# Altium PCB PCB-NW0101 Rev.A.1.PcbDoc (part 2 of 3)
Units mil, origin at the board's own origin, x right, y up, seen from the top; angles counter-clockwise.
Board outline 787.4 x 1377.95 mil, 6 copper layers (Top, GND, Inner3, Inner4, PWR, Bottom), stack 29.136 mil thick; 118 components, 126 nets, 559 pads, 476 vias.
Unrouted connection lines stored in the file: 214.
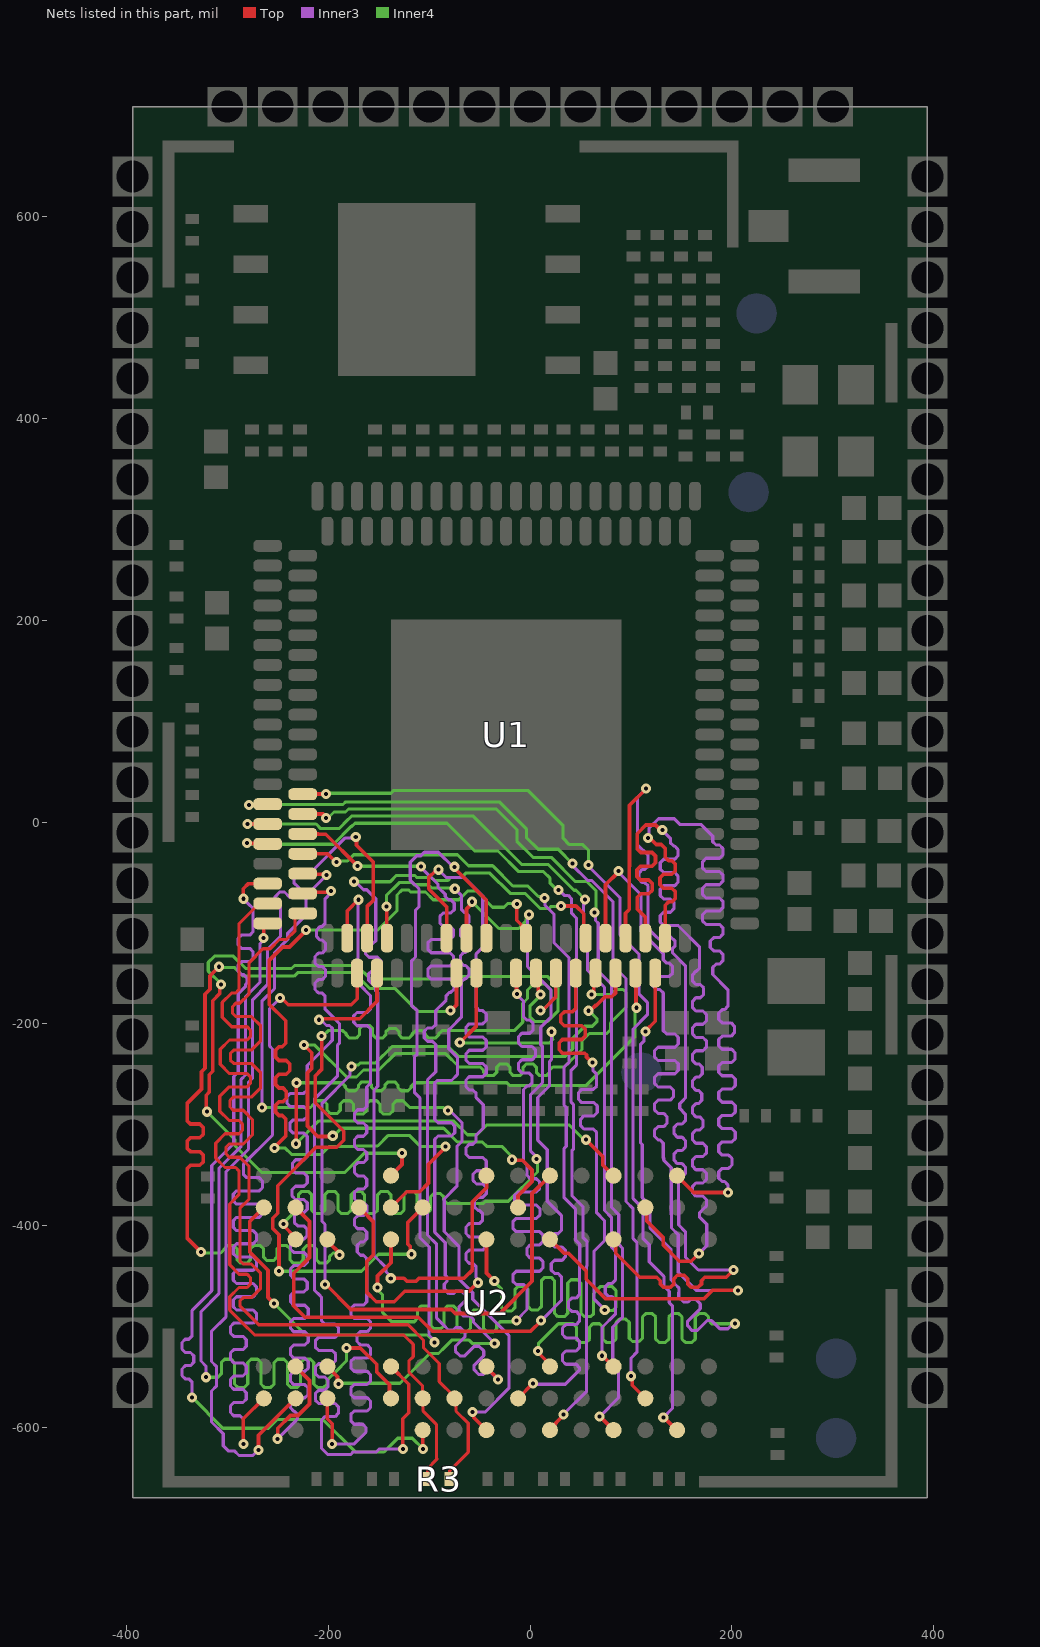
[diagram p6: the nets of this part, all layers, seen from the top]

## Via types
v1: diameter 10, hole 4, Top to Bottom, tented both sides, 476 vias

## Nets (pads, with @x,y where several pads share a name; then routed paths per layer and width w, separated by ;. In a path a pad name is that pad's centre, name@x,y a point inside that pad or via, vN(x,y) a via of type N, cw(c..) or ccw(c..) an arc to the next point about the centre after c; other vN are vias at no path point) (continued)
DDR_A4: U1.82 U2.N8 | length 917
  Top w3.63: U2.N8@-201,-572 -200.79,-572.21 -200.79,-591.24 -196,-596.03 v1(-196,-616) ; U1.82@-181.1,-114.96 -181.1,-88.11 v1@-170.08,-77.09
  Inner3 w3.1: v1(-196,-616) -174,-616 -164,-606 -162.45,-604.45 -162.45,-599.82 -165.72,-596.54 -174.24,-596.54 -177.51,-593.27 -177.51,-586.72 -174.24,-583.44 -161.37,-583.44 -158.1,-580.16 -158.1,-573.61 -161.37,-570.34 -174.24,-570.34 -177.51,-567.06 -177.51,-560.51 -174.24,-557.24 -161.37,-557.24 -158.1,-553.96 -158.1,-547.41 -161.37,-544.14 -174.24,-544.14 -177.51,-540.86 -177.51,-534.31 -174.24,-531.03 -161.37,-531.03 -158.1,-527.76 -158.1,-521.21 -161.37,-517.93 -168.17,-517.93 -171.45,-514.66 -171.45,-508.11 -168.17,-504.83 -161.37,-504.83 -158.1,-501.56 -158.1,-495 -161.37,-491.73 -174.24,-491.73 -177.51,-488.45 -177.51,-481.9 -174.24,-478.63 -165.01,-478.63 -161.73,-475.35 -161.73,-471 -161.73,-434 -161.73,-432.45 -165.01,-429.17 -167.89,-429.17 -171.17,-425.9 -171.17,-419.35 -167.89,-416.07 -165.01,-416.07 -161.73,-412.8 -161.73,-406.25 -165.01,-402.97 -170.62,-402.97 -173.9,-399.7 -173.9,-393.14 -170.62,-389.87 -165.01,-389.87 -161.73,-386.59 -161.73,-380.04 -165.01,-376.77 -170.62,-376.77 -173.9,-373.49 -173.9,-366.94 -170.62,-363.67 -165.01,-363.67 -161.73,-360.39 -161.73,-353.84 -165.01,-350.56 -170.62,-350.56 -173.9,-347.29 -173.9,-340.74 -170.62,-337.46 -165.01,-337.46 -161.73,-334.19 -161.73,-327.64 -165.01,-324.36 -170.62,-324.36 -173.9,-321.09 -173.9,-314.54 -170.62,-311.26 -165.01,-311.26 -161.73,-307.98 -161.73,-301.43 -165.01,-298.16 -170.62,-298.16 -173.9,-294.88 -173.9,-288.33 -170.62,-285.06 -165.01,-285.06 -161.73,-281.78 -161.73,-262.52 -158,-258.78 -158,-254.42 -158,-232.84 -158,-205.08 -161.27,-201.81 -171.37,-201.81 -174.64,-198.53 -174.64,-191.98 -171.37,-188.71 -161.27,-188.71 -158,-185.43 -158,-172.05 -168.85,-161.19 -169.04,-161 -170.51,-159.54 -170.51,-85 -170.51,-77.52 v1(-169.99,-77)
DDR_A5: U1.93 U2.N3 | length 897.3
  Top w3.63: v1(-325.86,-426) -339.72,-412.14 -339.72,-359 -339.72,-343.55 -336.31,-340.14 -327.25,-340.14 -323.84,-336.73 -323.84,-329.91 -327.25,-326.5 -336.31,-326.5 -339.72,-323.1 -339.72,-316.28 -336.31,-312.87 -327.25,-312.87 -323.84,-309.46 -323.84,-302.64 -327.25,-299.24 -336.31,-299.24 -339.72,-295.83 -339.72,-289 -339.72,-278.8 -325.45,-264.54 -325.45,-247.36 -321.94,-243.84 -321.94,-170.72 -317.02,-165.8 -317.02,-152.2 v1(-308.18,-143.37) ; U2.N3@-200.09,-413 -200.09,-415.76 -188.82,-427.03 v1(-188.82,-428.7) ; v1(-78.64,-186.91) -78.46,-186.91 -72.83,-181.28 U1.93@-72.83,-149.6
  Inner4 w3.09: v1(-325.86,-426) -324.86,-427 -308,-427 -306.46,-427 -303.18,-423.73 -303.18,-422.94 -299.91,-419.67 -293.37,-419.67 -290.1,-422.94 -290.1,-433.73 -286.83,-437 -280.28,-437 -277.01,-433.73 -277.01,-422.94 -273.74,-419.67 -267.2,-419.67 -263.93,-422.94 -263.93,-431.19 -260.65,-434.46 -254.11,-434.46 -250.84,-431.19 -250.84,-422.94 -247.57,-419.67 -241.02,-419.67 -237.75,-422.94 -237.75,-433.73 -234.48,-437 -227.94,-437 -224.67,-433.73 -224.67,-422.94 -221.39,-419.67 -214.85,-419.67 -211.58,-422.94 -211.58,-433.73 -208.31,-437 -201.77,-437 -198.49,-433.73 -198.49,-430.27 -195.22,-427 -191,-427 -190.52,-427 v1(-188.82,-428.7) ; v1(-308.18,-143.37) -307.56,-144 -292.88,-144 -284.25,-152.63 -233.72,-152.63 -230.27,-149.17 -174.64,-149.17 -159,-164.81 -134.1,-164.81 -111.37,-187.54 -79.27,-187.54 v1(-78.64,-186.91)
DDR_A6: U1.86 U2.N7 | length 897.3
  Top w3.63: U2.N7@-200.6,-539.62 -190.81,-549.41 -190.81,-555.28 v1(-189.59,-556.5) ; v1(-142.32,-83.68) -142.03,-83.97 -142.03,-114.67 U1.86@-141.73,-114.96
  Inner3 w3.1: v1@-74.53,-66.1 -68,-72.64 -68,-77 -68,-86.45 -64.72,-89.73 -63.83,-89.73 -60.55,-93 -60.55,-99.56 -63.83,-102.83 -65.62,-102.83 -68.9,-106.11 -68.9,-112.66 -65.62,-115.93 -63.83,-115.93 -60.55,-119.21 -60.55,-125.76 -63.83,-129.03 -65.62,-129.03 -68.9,-132.31 -68.9,-138.86 -65.62,-142.14 -63.83,-142.14 -60.55,-145.41 -60.55,-151.96 -63.83,-155.24 -64.72,-155.24 -68,-158.51 -68,-193.37 -78.63,-204 -80.55,-205.92 -80.55,-224.59 -72.03,-233.12 -72.03,-250.24 -77.79,-256 -92.04,-256 -94.45,-258.41 -94.45,-274 -94.45,-294.7 -91.17,-297.97 -77.83,-297.97 -74.55,-301.25 -74.55,-307.8 -77.83,-311.07 -91.17,-311.07 -94.45,-314.35 -94.45,-329 -94.45,-406.24 -83.96,-416.73 -83.96,-448.96 -82.86,-450.06 -82.35,-450.57 -82.35,-455.21 -85.03,-457.89 -85.03,-462.52 -80.4,-467.15 -75.77,-467.15 -73.08,-464.47 -68.45,-464.47 -63.82,-469.1 -63.82,-473.73 -70.28,-480.2 -70.28,-484.83 -65.65,-489.46 -59.28,-489.46 -56,-492.74 -56,-495.63 -54.91,-496.73 v1(-35,-516.63)
  Inner4 w3.09: v1(-189.59,-556.5) -189.09,-556 -128.82,-556 -99.37,-526.54 -90.63,-526.54 -84.4,-520.31 -84.4,-520.2 -77.2,-513 -60.82,-513 -57.37,-516.46 -35.18,-516.46 v1(-35,-516.63) ; v1(-142.32,-83.68) -142.32,-72.84 -129.57,-60.09 -116.85,-60.09 -114.75,-62.18 -100.65,-62.18 -97.29,-65.54 -75.12,-65.54 v1(-74.56,-66.1)
DDR_A7: U1.95 U2.P2 | length 889.9
  Top w3.63: -234.29,-479.29 -222.95,-490.62 -110.64,-490.62 -96.68,-504.57 0.43,-504.57 v1(11,-494) ; -234,-479 -234,-446.92 -218.47,-431.38 -218.47,-395.71 U2.P2@-232.28,-381.89 ; v1(-69.61,-218.57) -53.15,-202.15 U1.95@-53.15,-149.6
  Inner3 w3.1: v1(11,-494) 31,-474 31,-452 31,-450.45 27.72,-447.17 24.28,-447.17 21,-443.9 21,-437.35 24.28,-434.07 31.76,-434.07 35.03,-430.8 35.03,-424.25 31.76,-420.97 24.28,-420.97 21,-417.7 21,-411.14 24.28,-407.87 27.72,-407.87 31,-404.59 31,-396 31,-389.7 17.06,-375.77 17.06,-324.52 7.65,-315.11 7.65,-272.86 19.43,-261.07 19.43,-237.11 21.11,-235.44 v1(21.11,-207.77)
  Inner4 w3.09: v1(-69.61,-218.57) -69.19,-219 19,-219 22.67,-215.33 22.43,-215.08 22.43,-209.1 v1(21.11,-207.77)
DDR_A8: U1.84 U2.P8 | length 932.9
  Top w3.63: v1(-269,-622) -269,-607.58 -233,-571.58 U2.P8@-233,-570 ; v1(-172.67,-14.83) -171.91,-15.6 -171.91,-23.09 -155.35,-39.65 -155.35,-77.66 -161.42,-83.72 U1.84@-161.42,-114.96
  Inner3 w3.1: v1(-269,-622) -274.55,-627.55 -288.37,-627.55 -292.92,-623 -299,-623 -303.93,-618.07 -303.93,-605.99 -315.55,-594.37 -315.55,-563.63 -310.45,-558.53 -310.45,-539.47 -315.55,-534.37 -315.55,-504.4 -301.1,-489.95 -301.1,-346.19 -278.95,-324.03 -278.95,-257.71 -274.8,-253.56 -274.8,-175.93 -260.25,-161.38 -260.25,-126.3 -247.14,-113.2 -247.14,-90.86 -247.14,-84.03 -252.54,-78.64 -252.54,-74 -247.91,-69.37 -243.27,-69.37 -238.16,-74.49 -233.53,-74.49 -228.9,-69.85 -228.9,-65.22 -234.01,-60.11 -234.01,-55.48 -229.38,-50.84 -224.74,-50.84 -220.61,-54.98 -215.98,-54.98 -214,-53 -214,-46.79 -182.92,-15.71 -173.55,-15.71 v1(-172.67,-14.83)
DDR_A9: U1.94 U2.P3 | length 881.3
  Top w3.63: v1(-244.07,-398.26) -244.07,-399.93 -233,-411 U2.P3@-233,-413 ; U1.94@-62.99,-114.96 -62.99,-86.27 -57.45,-80.72 v1(-57.45,-79)
  Inner3 w3.1: v1(-1.16,-91.83) -2.45,-93.12 -2.45,-143.25 20.9,-166.61 20.9,-184.02 20.9,-193.05 10.55,-203.39 10.55,-220.81 12.42,-222.68 12.42,-234.08 12.33,-234.17 12.33,-258.13 0.55,-269.91 0.55,-326.05 6.51,-332.01 v1(6.51,-333.88)
  Inner4 w3.09: v1(-244.07,-398.26) -244.07,-397.07 -231.04,-384.04 -229.5,-382.5 -229.5,-369.11 -226.23,-365.83 -219.69,-365.83 -216.41,-369.11 -216.41,-384.47 -213.14,-387.74 -206.6,-387.74 -203.33,-384.47 -203.33,-369.11 -200.06,-365.83 -193.51,-365.83 -190.24,-369.11 -190.24,-384.47 -186.97,-387.74 -180.43,-387.74 -177.16,-384.47 -177.16,-369.11 -173.88,-365.83 -167.34,-365.83 -164.07,-369.11 -164.07,-384.47 -160.8,-387.74 -154.25,-387.74 -150.98,-384.47 -150.98,-369.11 -147.71,-365.83 -141.17,-365.83 -137.9,-369.11 -137.9,-384.47 -134.62,-387.74 -128.08,-387.74 -124.81,-384.47 -124.81,-369.11 -121.54,-365.83 -115,-365.83 -111.72,-369.11 -111.72,-384.47 -108.45,-387.74 -101.91,-387.74 -98.64,-384.47 -98.64,-371.3 -95.37,-368.03 -88.82,-368.03 -85.55,-371.3 -85.55,-374.47 -82.28,-377.74 -68.57,-377.74 -46.1,-377.74 -44.02,-375.66 -21.55,-375.66 7.42,-346.69 7.42,-334.79 v1(6.51,-333.88) ; v1(-57.45,-79) -30.91,-105.54 -11.34,-105.54 -3.74,-97.95 -3.74,-96.27 -1.16,-93.7 v1(-1.16,-91.83)
DDR_A10: U1.92 U2.M2 | length 935.6
  Top w3.63: U2.M2@-166,-383 -166,-385.18 -155.47,-395.71 -155.47,-429.16 -161.9,-435.59 -161.9,-465.7 -152.24,-475.35 -134.54,-475.35 -125.06,-465.88 -124,-464.82 -71.06,-464.82 -60.49,-464.82 -52.05,-456.37 v1(-51.59,-456.37) ; v1(-90.65,-47.24) -92.27,-47.24 -97.27,-52.24 -97.76,-52.24 -100.33,-54.81 -100.33,-66.26 -82.68,-83.91 U1.92@-82.68,-114.96
  Inner3 w3.1: v1(-90.65,-47.24) -82.98,-54.91 -65.35,-54.91 -46.9,-73.36 -46.9,-124.04 -53.45,-130.59 -53.45,-182 -53.45,-183.55 -50.17,-186.83 -46.72,-186.83 -43.45,-190.1 -43.45,-196.65 -46.72,-199.93 -60.17,-199.93 -63.45,-203.2 -63.45,-209.75 -60.17,-213.03 -46.72,-213.03 -43.45,-216.3 -43.45,-222.86 -46.72,-226.13 -60.17,-226.13 -63.45,-229.41 -63.45,-235.96 -60.17,-239.23 -46.72,-239.23 -43.45,-242.51 -43.45,-249.06 -46.72,-252.33 -60.17,-252.33 -63.45,-255.61 -63.45,-262.16 -60.17,-265.44 -56.72,-265.44 -53.45,-268.71 -53.45,-273 -46.35,-280.1 -46.35,-303.08 -52.53,-309.26 -52.71,-309.26 -53.45,-310 -53.45,-315.98 -56.72,-319.26 -60.17,-319.26 -63.45,-322.54 -63.45,-329.09 -60.17,-332.36 -46.72,-332.36 -43.45,-335.64 -43.45,-342.19 -46.72,-345.46 -53.11,-345.46 -56.39,-348.74 -56.39,-355.29 -53.11,-358.56 -46.72,-358.56 -43.45,-361.84 -43.45,-368.39 -46.72,-371.67 -51.6,-371.67 -54.87,-374.94 -54.87,-381.49 -51.6,-384.77 -50.28,-384.77 -47,-388.04 -47,-394.59 -50.28,-397.87 -60.17,-397.87 -63.45,-401.14 -63.45,-407.7 -60.17,-410.97 -46.72,-410.97 -43.45,-414.25 -43.45,-420.8 -46.72,-424.07 -60.17,-424.07 -63.45,-427.35 -63.45,-433.9 -60.17,-437.17 -56.72,-437.17 -53.45,-440.45 -53.45,-442 -53.45,-451.11 -52.91,-451.65 -52.91,-455.05 v1(-51.59,-456.37)
DDR_A11: U1.85 U2.P7 | length 929.2
  Top w3.63: v1(-250,-611) -250,-600.54 -237.42,-587.95 -229.83,-587.95 -218.47,-576.59 -218.47,-553.19 -233,-538.65 U2.P7@-233,-538 ; v1(-209.24,-195.88) -208.18,-194.82 -168.82,-194.82 -151.58,-177.58 U1.85@-151.58,-149.6
  Inner3 w3.1: v1(-250,-611) -232,-593 -230.45,-591.45 -230.45,-586.82 -233.72,-583.54 -234.05,-583.54 -237.32,-580.27 -237.32,-573.72 -234.05,-570.44 -223.01,-570.44 -219.73,-567.16 -219.73,-560.61 -223.01,-557.34 -234.05,-557.34 -237.32,-554.06 -237.32,-547.51 -234.05,-544.24 -223.01,-544.24 -219.73,-540.96 -219.73,-534.41 -223.01,-531.14 -234.05,-531.14 -237.32,-527.86 -237.32,-521.31 -234.05,-518.03 -223.01,-518.03 -219.73,-514.76 -219.73,-508.21 -223.01,-504.93 -234.05,-504.93 -237.32,-501.66 -237.32,-495.11 -234.05,-491.83 -223.01,-491.83 -219.73,-488.56 -219.73,-482 -223.01,-478.73 -234.05,-478.73 -237.32,-475.45 -237.32,-468.9 -234.05,-465.63 -224.01,-465.63 -220.73,-462.35 -220.73,-455.8 -224.01,-452.53 -234.05,-452.53 -237.32,-449.25 -237.32,-442.7 -234.05,-439.42 -224.01,-439.42 -220.73,-436.15 -220.73,-429.6 -224.01,-426.32 -234.05,-426.32 -237.32,-423.05 -237.32,-416.5 -234.05,-413.22 -224.01,-413.22 -220.73,-409.95 -220.73,-403.4 -224.01,-400.12 -230.24,-400.12 -233.52,-396.85 -233.52,-390.29 -230.24,-387.02 -224.01,-387.02 -220.73,-383.74 -220.73,-377.19 -224.01,-373.92 -232.39,-373.92 -235.66,-370.64 -235.66,-364.09 -232.39,-360.82 -224.01,-360.82 -220.73,-357.54 -220.73,-350.99 -224.01,-347.71 -232.09,-347.71 -235.37,-344.44 -235.37,-337.89 -232.09,-334.61 -224.01,-334.61 -220.73,-331.34 -220.73,-323.1 -220.73,-313 -220.73,-311.45 -224.01,-308.17 -234.7,-308.17 -237.98,-304.9 -237.98,-298.35 -234.7,-295.07 -224.01,-295.07 -220.73,-291.8 -220.73,-285.25 -224.01,-281.97 -237.43,-281.97 -240.7,-278.7 -240.7,-272.14 -237.43,-268.87 -224.01,-268.87 -220.73,-265.59 -220.73,-243 -220.73,-241.18 -197.96,-218.4 -197.96,-218.27 -195.95,-216.26 -195.95,-204.3 -198.66,-201.59 -201.67,-201.59 -207.38,-195.88 v1(-209.24,-195.88)
DDR_A12: U1.96 U2.R2 | length 917
  Top w3.63: U2.R2@-264,-382 -264,-382.11 -277.6,-395.71 -277.6,-425.92 -259.52,-444 -259.52,-470.93 v1(-253.45,-477) ; v1(-74.92,-44.36) -74.92,-45.72 -43.31,-77.33 U1.96@-43.31,-114.96
  Inner3 w3.1: v1(-94.71,-515.39) -94.71,-513.52 -100.04,-508.2 -100.04,-451.8 -99.8,-451.56 -99.8,-420.97 -109.12,-411.65 -109.12,-273.26 -114.55,-267.82 -114.55,-232.7 -111.91,-230.07 -111.91,-187.01 -117.55,-181.37 -117.55,-137.88 -113.45,-133.78 -113.45,-87.42 -110,-83.97 -110,-66.24 -118.71,-57.52 -118.71,-39.79 -112.37,-33.45 -108.15,-33.45 -104.64,-29.95 -90.78,-29.95 -76.37,-44.36 v1(-74.92,-44.36)
  Inner4 w3.09: v1(-253.45,-477) -222.31,-508.13 -101.97,-508.13 v1(-94.71,-515.39)
DDR_A13: U1.83 U2.R8 | length 946.5
  Top w3.63: v1(-283.93,-616.26) -284,-616.19 -284,-591.09 -263.91,-571 U2.R8@-263,-571 ; v1(-247.67,-174.5) -245.95,-174.5 -239.45,-181 -177.06,-181 -171.26,-175.2 U1.83@-171.26,-149.6
  Inner3 w3.1: v1(-283.93,-616.26) -284,-616.19 -284,-592.99 -284,-591.44 -287.28,-588.16 -293.49,-588.16 -296.76,-584.89 -296.76,-578.34 -293.49,-575.06 -284.38,-575.06 -281.1,-571.79 -281.1,-565.24 -284.38,-561.96 -293.49,-561.96 -296.76,-558.68 -296.76,-552.13 -293.49,-548.86 -284.38,-548.86 -281.1,-545.58 -281.1,-539.03 -284.38,-535.76 -293.49,-535.76 -296.76,-532.48 -296.76,-525.93 -293.49,-522.66 -284.38,-522.66 -281.1,-519.38 -281.1,-512.83 -284.38,-509.55 -293.49,-509.55 -296.76,-506.28 -296.76,-499.73 -293.49,-496.45 -274.38,-496.45 -271.1,-493.18 -271.1,-486.63 -274.38,-483.35 -290.72,-483.35 -294,-480.08 -294,-473.52 -290.72,-470.25 -274.38,-470.25 -271.1,-466.97 -271.1,-460.42 -274.38,-457.15 -290.72,-457.15 -294,-453.87 -294,-447.32 -290.72,-444.05 -274.38,-444.05 -271.1,-440.77 -271.1,-434.22 -274.38,-430.94 -290.72,-430.94 -294,-427.67 -294,-421.12 -290.72,-417.84 -274.38,-417.84 -271.1,-414.57 -271.1,-408.02 -274.38,-404.74 -290.72,-404.74 -294,-401.47 -294,-394.92 -290.72,-391.64 -268.28,-391.64 -265.01,-388.37 -265.01,-381.81 -268.28,-378.54 -290.72,-378.54 -294,-375.26 -294,-368.71 -290.72,-365.44 -268.28,-365.44 -265.01,-362.16 -265.01,-355.61 -268.28,-352.34 -280.72,-352.34 -284,-349.06 -284,-341 -284,-339.13 -255.11,-310.23 -255.11,-224.84 -257.93,-222.01 -257.93,-184.76 v1(-247.67,-174.5)
DDR_BA0: U1.100 U2.L2 | length 853.6
  Top w3.63: v1(-253.02,-323.07) -253.02,-322.02 -242.1,-311.1 -242.1,-296 -242.1,-294.18 -245.51,-290.77 -248.69,-290.77 -252.1,-287.36 -252.1,-280.55 -248.69,-277.14 -244.8,-277.14 -241.4,-273.73 -241.4,-266.91 -244.8,-263.5 -248.69,-263.5 -252.1,-260.1 -252.1,-253.28 -248.69,-249.87 -241.54,-249.87 -238.13,-246.46 -238.13,-239.64 -241.54,-236.24 -248.69,-236.24 -252.1,-232.83 -252.1,-226.01 -248.69,-222.6 -245.51,-222.6 -242.1,-219.19 -242.1,-204 -242.1,-196.88 -258.49,-180.49 -258.49,-137.17 -245.08,-123.76 -238.34,-123.76 -222,-107.42 v1(-222,-107) ; U2.L2@-137,-381.09 -122.27,-366.36 -109.33,-366.36 -100.53,-357.55 -100.53,-339.15 -83.69,-322.31 v1(-83.69,-321.62) ; v1(-13.13,-81.21) -13.27,-81.35 -13.27,-97.36 -3.94,-106.69 U1.100@-3.94,-114.96
  Inner4 w3.09: v1(-253.02,-323.07) -242.48,-323.07 -236.29,-329.27 -206.75,-329.27 -198.85,-321.37 -175.07,-321.37 -174.7,-321 -150.93,-321 -140.38,-310.46 -119.65,-310.46 -108.74,-321.37 -83.94,-321.37 v1(-83.69,-321.62) ; v1(-222,-107) -150.73,-107 -131.78,-88.05 -131.78,-72.32 -126.63,-67.17 -120.56,-67.17 -118.46,-69.26 -103.59,-69.26 -95.89,-76.96 -70.5,-76.96 -62,-68.46 -53.08,-68.46 -44.69,-76.85 -44.69,-77.01 -37.25,-84.46 -25.79,-84.46 -22.09,-80.76 -13.58,-80.76 v1(-13.13,-81.21)
DDR_BA1: U1.99 U2.L3 | length 896.6
  Top w3.63: v1(-151.08,-461.22) -151.08,-449.78 -137.8,-436.5 U2.L3@-137.8,-413.8 ; U1.99@-13.78,-149.6 -13.39,-149.99 -13.39,-169.83 v1(-13,-170.22)
  Inner3 w3.1: v1(-13.32,-493.76) -13.32,-493.32 -2.96,-482.96 -2.96,-463 -2.96,-461.45 -6.24,-458.17 -13.69,-458.17 -16.96,-454.9 -16.96,-448.35 -13.69,-445.07 9.47,-445.07 12.75,-441.8 12.75,-435.25 9.47,-431.97 0.31,-431.97 -2.96,-428.7 -2.96,-422.14 0.31,-418.87 9.47,-418.87 12.75,-415.59 12.75,-409.04 9.47,-405.77 -13.69,-405.77 -16.96,-402.49 -16.96,-395.94 -13.69,-392.67 6.46,-392.67 9.73,-389.39 9.73,-382.84 6.46,-379.56 -11.97,-379.56 -15.25,-376.29 -15.25,-369.74 -11.97,-366.46 6.17,-366.46 9.45,-363.19 9.45,-356.64 6.17,-353.36 0.31,-353.36 -2.96,-350.09 -2.96,-339.96 -6.55,-336.37 -6.55,-264.93 -3.28,-261.65 -1.23,-261.65 2.05,-258.38 2.05,-251.82 -1.23,-248.55 -8.07,-248.55 -11.35,-245.27 -11.35,-238.72 -8.07,-235.45 2.05,-235.45 5.32,-232.17 5.32,-225.62 2.05,-222.35 -8.07,-222.35 -11.35,-219.07 -11.35,-212.52 -8.07,-209.24 -0.24,-209.24 3.04,-205.97 3.04,-199.42 -0.24,-196.14 -3.28,-196.14 -6.55,-192.87 -6.55,-191 -6.55,-177.62 -13,-171.16 v1(-13,-170.22)
  Inner4 w3.09: v1(-151.08,-461.22) -151.08,-463.09 -149.51,-464.66 -149.51,-465.07 -146,-468.58 -146,-486 -145.36,-486.64 -137,-495 -114.72,-495 -111.45,-491.73 -111.45,-482.9 -108.18,-479.63 -101.64,-479.63 -98.37,-482.9 -98.37,-498.76 -95.09,-502.03 -88.55,-502.03 -85.28,-498.76 -85.28,-482.9 -82.01,-479.63 -75.46,-479.63 -72.19,-482.9 -72.19,-501.73 -68.92,-505 -62.38,-505 -59.11,-501.73 -59.11,-486.83 -55.83,-483.56 -49.29,-483.56 -46.02,-486.83 -46.02,-501.73 -42.75,-505 -36.21,-505 -32.93,-501.73 -32.93,-498.27 -29.66,-495 -28.12,-495 -14.56,-495 v1(-13.32,-493.76)
DDR_BA2: U1.101 U2.L1 | length 888.7
  Top w3.63: v1(-320,-287) -320.86,-286.14 -320.86,-270.74 -317.67,-267.55 -317.67,-250.37 -314.3,-247.01 -314.3,-177 -307.29,-169.99 -307.29,-162.1 v1(-306.07,-160.88) ; U2.L1@-137,-350 -137,-349.6 -126.77,-339.37 v1(-126.77,-328.09) ; U1.101@5.91,-149.6 8.07,-151.77 8.07,-166.98 10.22,-169.13 v1(10.22,-170.85)
  Inner4 w3.09: v1(-320,-287) -292.32,-314.68 -292.32,-320.76 -265.96,-347.12 -183.37,-347.12 -164.33,-328.09 v1(-126.77,-328.09) ; v1(-306.07,-160.88) -306.07,-160.39 -318.73,-147.74 -318.73,-139 -312.55,-132.83 -294.03,-132.83 -281.73,-145.12 -236.24,-145.12 -233.2,-142.09 -171.71,-142.09 -158.46,-155.33 -71.53,-155.33 -69.41,-153.22 17.52,-153.22 27.85,-163.55 27.85,-187.01 17.41,-197.46 4.36,-197.46 -0.2,-192.9 -0.2,-182.54 10.22,-172.12 v1(10.22,-170.85)
DDR_CAS: U1.75 U2.L7 | length 928.7
  Top w3.63: U1.75@-225.2,-70.86 -223.61,-69.28 -223.35,-69.54 -198.48,-69.54 v1(-197.27,-68.33) ; U2.L7@-138.17,-539 -120.12,-557.05 -120.12,-585.22 -126,-591.1 v1(-126,-621)
  Inner3 w3.1: v1(-197.27,-68.33) -197.27,-70.19 -203,-75.93 -203,-80 -203,-100.46 -206.28,-103.74 -208.17,-103.74 -211.45,-107.01 -211.45,-113.56 -208.17,-116.84 -205.94,-116.84 -202.67,-120.11 -202.67,-126.67 -205.94,-129.94 -209.72,-129.94 -213,-133.22 -213,-139.77 -209.72,-143.04 -205.94,-143.04 -202.67,-146.32 -202.67,-152.87 -205.94,-156.14 -209.72,-156.14 -213,-159.42 -213,-165.97 -209.72,-169.25 -206.28,-169.25 -203,-172.52 -203,-185.51 -191.51,-197 -188.84,-199.66 -188.84,-219.2 -190.85,-221.21 -190.85,-251.85 -213.63,-274.63 -213.63,-463.64 -208.37,-468.9 -206.55,-470.72 -206.55,-486 -206.55,-494.09 -203.28,-497.36 -193.12,-497.36 -189.84,-500.64 -189.84,-507.19 -193.12,-510.46 -209.36,-510.46 -212.63,-513.74 -212.63,-520.29 -209.36,-523.56 -195.83,-523.56 -192.55,-526.84 -192.55,-533.39 -195.83,-536.67 -209.36,-536.67 -212.63,-539.94 -212.63,-546.49 -209.36,-549.77 -203.42,-549.77 -200.14,-553.04 -200.14,-559.59 -203.42,-562.87 -209.36,-562.87 -212.63,-566.14 -212.63,-572.7 -209.36,-575.97 -193.12,-575.97 -189.84,-579.25 -189.84,-585.8 -193.12,-589.07 -203.28,-589.07 -206.55,-592.35 -206.55,-607 -206.55,-620.37 -200.37,-626.55 -177.54,-626.55 -175,-624.01 -152.17,-624.01 -149.16,-621 v1(-126,-621)
DDR_CKE: U1.103 U2.K2 | length 860.7
  Top w3.63: v1(-248.7,-445) -248.7,-408.93 -249.96,-407.66 -254.98,-402.64 -254.98,-392.63 -249.96,-387.61 -249.96,-360.2 -212.04,-322.27 -191.6,-322.27 -184.63,-315.31 -184.63,-306.35 -212.83,-278.15 -212.83,-251.53 -206.5,-245.19 v1(-206.5,-212.02) ; v1(-117.53,-428.2) -118.75,-426.99 -118.75,-420.48 -121,-418.23 -121,-396.59 -109,-384.59 U2.K2@-109,-384 ; v1(10.35,-186.91) 11.97,-186.91 25.59,-173.29 U1.103@25.59,-149.6
  Inner4 w3.09: v1(-248.7,-445) -166.93,-445 -150.14,-428.2 v1(-117.53,-428.2) ; v1(-206.5,-212.02) -205.39,-212.02 -200,-206.63 -185.37,-206.63 -182.1,-209.9 -182.1,-210.82 -178.83,-214.09 -172.28,-214.09 -169.01,-210.82 -169.01,-204.7 -165.74,-201.43 -159.2,-201.43 -155.93,-204.7 -155.93,-210.82 -152.65,-214.09 -146.11,-214.09 -142.84,-210.82 -142.84,-207.81 -139.57,-204.54 -133.02,-204.54 -129.75,-207.81 -129.75,-210.82 -126.48,-214.09 -119.94,-214.09 -116.67,-210.82 -116.67,-209.9 -113.39,-206.63 -106.85,-206.63 -103.58,-209.9 -103.58,-210.82 -100.31,-214.09 -93.77,-214.09 -90.49,-210.82 -90.49,-209.9 -87.22,-206.63 -76,-206.63 -15.63,-206.63 -7.28,-198.28 -7.28,-179.61 -2.46,-174.79 -2.46,-166.46 3.69,-160.31 14.59,-160.31 20.76,-166.48 20.76,-178.12 11.97,-186.91 v1(10.35,-186.91)
DDR_CLK_N: R3.1 U1.76 U2.K8 | length 947.6
  Top w3.12: U1.76@-259.84,-80.71 -268.11,-80.71 -288.44,-101.04 -288.44,-139.26 -288.44,-166.14 -291.72,-169.42 -295.66,-169.42 -304.86,-178.63 -304.86,-193.57 -295.66,-202.78 -280.28,-202.78 -277,-206.06 -277,-212.62 -280.28,-215.9 -297.72,-215.9 -306.93,-225.1 -306.93,-240.04 -297.72,-249.25 -280.28,-249.25 -277,-252.53 -277,-259.09 -280.28,-262.37 -298.15,-262.37 -307.36,-271.58 -307.36,-286.52 -298.15,-295.72 -288.3,-295.72 -285.02,-299 -285.02,-305.56 -288.3,-308.84 -302.16,-308.84 -311.37,-318.05 -311.37,-332.99 -302.16,-342.2 -291.72,-342.2 -288.44,-345.48 -288.44,-350 -288.44,-369.32 -297.52,-378.4 -297.52,-389 -297.52,-438.76 -288.32,-447.97 -280.29,-447.97 -277.01,-451.25 -277.01,-457.81 -280.29,-461.09 -288.32,-461.09 -297.52,-470.29 -297.52,-483.48 -285,-496 -272.88,-508.12 -260.51,-508.12 -125,-508.12 -115.68,-517.44 -115.68,-529.57 -119.86,-533.75 -119.86,-544.99 -106.66,-558.19 -106.66,-570.51 U2.K8@-106.3,-570.87 U2.K8@-105.94,-571.22 ; U2.K8@-106,-570 -105.94,-570.06 U2.K8@-105.94,-571.22 ; R3.1@-101.38,-653.54 -101.38,-652.87 -101.38,-640.38 -92.91,-631.91 -92,-631 -92.74,-630.26 -92.74,-596.75 -105.94,-583.54 U2.K8@-105.94,-571.22
DDR_CLK_P: R3.2 U1.77 U2.J8 | length 958.1
  Top w3.12: U1.77@-225.2,-90.55 -228.57,-90.55 -232.72,-94.7 -232.72,-107.71 -241.39,-116.38 -248.14,-116.38 -257.35,-125.59 -264.65,-125.59 -278.32,-139.26 -278.32,-170.33 -287.53,-179.54 -291.47,-179.54 -294.75,-182.82 -294.75,-189.38 -291.47,-192.66 -276.09,-192.66 -266.88,-201.87 -266.88,-216.81 -276.09,-226.01 -293.53,-226.01 -296.81,-229.29 -296.81,-235.85 -293.53,-239.13 -276.09,-239.13 -266.88,-248.34 -266.88,-263.28 -276.09,-272.49 -293.96,-272.49 -297.24,-275.77 -297.24,-282.33 -293.96,-285.61 -284.11,-285.61 -274.9,-294.81 -274.9,-309.75 -284.11,-318.96 -297.97,-318.96 -301.25,-322.24 -301.25,-328.8 -297.97,-332.08 -287.53,-332.08 -278.32,-341.29 -278.32,-350 -278.32,-373.51 -287.4,-382.6 -287.4,-389 -287.4,-434.57 -284.12,-437.85 -276.1,-437.85 -266.89,-447.06 -266.89,-462 -276.1,-471.2 -284.12,-471.2 -287.4,-474.48 -287.4,-479.29 -270.69,-496 -268.69,-498 -260.51,-498 -125,-498 -120.81,-498 -105.56,-513.25 -105.56,-520.87 -90,-536.43 -90,-554.32 U2.J8@-75.83,-568.49 ; R3.2@-79.72,-653.54 -79.72,-642.72 -61.24,-624.24 -61.24,-595.64 -73.34,-583.54 -73.34,-572.33 U2.J8@-74.8,-570.87
DDR_CS: U1.78 U2.L8 | length 900.3
  Top w3.63: v1(-263.9,-115.03) -263.9,-104.3 -259.99,-100.39 U1.78@-259.84,-100.39 ; v1(-182,-521) -168.12,-521 -151.87,-537.26 -151.87,-544.84 -139.29,-557.41 -139.29,-567.71 U2.L8@-138,-569
  Inner3 w3.1: v1(-321,-550) -321,-538.96 -325.99,-533.98 -325.99,-484.99 -308.2,-467.21 -308.2,-343.25 -286.21,-321.25 -286.21,-254.93 -281.9,-250.62 -281.9,-172.99 -267.35,-158.44 -267.35,-120.35 -263.9,-116.9 v1(-263.9,-115.03)
  Inner4 w3.09: v1(-321,-550) -310.64,-550 -309.1,-550 -305.83,-546.73 -305.83,-535.45 -302.56,-532.18 -296.01,-532.18 -292.74,-535.45 -292.74,-556.73 -289.47,-560 -282.93,-560 -279.66,-556.73 -279.66,-535.45 -276.38,-532.18 -269.84,-532.18 -266.57,-535.45 -266.57,-556.73 -263.3,-560 -256.75,-560 -253.48,-556.73 -253.48,-535.45 -250.21,-532.18 -243.67,-532.18 -240.4,-535.45 -240.4,-556.73 -237.13,-560 -230.58,-560 -227.31,-556.73 -227.31,-535.45 -224.04,-532.18 -217.5,-532.18 -214.22,-535.45 -214.22,-556.73 -210.95,-560 -204.41,-560 -201.14,-556.73 -201.14,-553.14 -192,-544 -182,-534 v1(-182,-521)
DDR_D0: U1.71 U2.G8 | length 892
  Top w3.63: U1.71@-225.2,-31.49 -200.54,-31.49 -192.41,-39.63 v1(-191.92,-39.63) ; U2.G8@-11.81,-570.87 3,-556.05 v1(3,-556)
  Inner3 w3.1: v1@2,-555 v1(3,-556) 4,-557 35,-557 48.9,-543.1 48.9,-542 48.9,-540.45 45.62,-537.17 35.46,-537.17 32.18,-533.9 32.18,-527.35 35.46,-524.07 45.62,-524.07 48.9,-520.8 48.9,-514.25 45.62,-510.97 35.46,-510.97 32.18,-507.7 32.18,-501.14 35.46,-497.87 45.62,-497.87 48.9,-494.59 48.9,-488.04 45.62,-484.77 41.38,-484.77 38.1,-481.49 38.1,-474.94 41.38,-471.67 45.62,-471.67 48.9,-468.39 48.9,-450 48.9,-437.02 49.24,-436.68 49.24,-418.36 45.2,-414.33 45.2,-383.76 33.73,-372.29 33.73,-323.3 35.86,-321.17 35.86,-282.71 33.64,-280.49 33.64,-243 38.76,-237.88 38.76,-134.72 23.71,-119.68 23.71,-91.21 14.7,-82.19 14.7,-75.5 v1(14.32,-75.12)
  Inner4 w3.09: v1(-191.92,-39.63) -191.33,-39.63 -190.28,-38.58 -180.74,-38.58 -174.63,-32.46 -71.9,-32.46 -61,-43.37 -37.04,-43.37 -17.06,-63.35 -2.27,-63.35 8.19,-73.8 13,-73.8 v1(14.32,-75.12)
DDR_D1: U1.107 U2.G2 | length 862.4
  Top w3.63: v1(-223.94,-221.03) -216.37,-228.61 -216.37,-244.26 -220.47,-248.36 -220.47,-301.24 -210.25,-311.46 -196.08,-311.46 v1(-195.45,-310.83) ; v1(-18.04,-334.58) -17.54,-335.08 -7.59,-335.08 2.01,-344.67 2.01,-356.12 -12,-370.12 U2.G2@-12,-375 ; v1@62.95,-167.33 62.95,-151.62 U1.107@64.96,-149.6
  Inner4 w3.09: v1(-223.94,-221.03) -213.22,-221.03 -181.66,-252.59 -171.98,-252.59 -165.01,-245.63 -149.74,-245.63 -133.57,-229.46 -83.66,-229.46 -70.37,-242.75 -64,-242.75 -49.37,-242.75 -46.1,-246.02 -46.1,-247.96 -42.83,-251.23 -36.28,-251.23 -33.01,-247.96 -33.01,-242.81 -29.74,-239.54 -23.2,-239.54 -19.93,-242.81 -19.93,-247.96 -16.65,-251.23 -10.11,-251.23 -6.84,-247.96 -6.84,-242.81 -3.57,-239.54 2.98,-239.54 6.25,-242.81 6.25,-247.96 9.52,-251.23 16.06,-251.23 19.33,-247.96 19.33,-246.02 22.61,-242.75 29,-242.75 34.05,-242.75 51.4,-225.4 51.4,-216.85 58.81,-209.43 76.04,-209.43 79.66,-205.81 79.66,-198.97 95.11,-183.52 95.11,-168.81 92.24,-165.95 84.79,-165.95 79.73,-171 v1(61,-171) ; v1(-195.45,-310.83) -194.56,-310.83 -187.11,-303.37 -85.56,-303.37 -72.02,-316.91 -47.29,-316.91 -42.92,-321.29 -28.04,-321.29 -19.36,-329.97 -19.36,-333.25 v1(-18.04,-334.58)
DDR_D2: U1.69 U2.H7 | length 894.6
  Top w3.63: U1.69@-225.2,-11.81 -225.02,-11.63 -210,-11.63 ; -210,-12 -202.38,-12 v1(-170.82,-43.56) ; U2.H7@-43.31,-539.37 -43.31,-540.03 -31.55,-551.79 v1(-31.55,-552.45)
  Inner3 w3.1: v1(-108.16,-44.16) -108.16,-44.66 -91.12,-61.7 -91.12,-64.46 -84.04,-71.54 -84.04,-72.23 -84.04,-73.78 -80.76,-77.06 -78.38,-77.06 -75.1,-80.33 -75.1,-86.89 -78.38,-90.16 -86.08,-90.16 -89.35,-93.44 -89.35,-99.99 -86.08,-103.26 -79.28,-103.26 -76,-106.54 -76,-113.09 -79.28,-116.36 -97.89,-116.36 -101.17,-119.64 -101.17,-126.19 -97.89,-129.47 -79.28,-129.47 -76,-132.74 -76,-139.29 -79.28,-142.57 -97.89,-142.57 -101.17,-145.84 -101.17,-152.39 -97.89,-155.67 -78.38,-155.67 -75.1,-158.94 -75.1,-165.49 -78.38,-168.77 -79.82,-168.77 -83.09,-172.05 -83.09,-176.44 -88.1,-181.45 -89.65,-183 -93.45,-186.8 -93.45,-193 -93.45,-200.8 -96.72,-204.07 -101.54,-204.07 -104.81,-207.35 -104.81,-213.9 -101.54,-217.17 -96.72,-217.17 -93.45,-220.45 -93.45,-222 -93.45,-247.37 -101.55,-255.47 -101.55,-409.18 -92.51,-418.22 -92.51,-491.49 -87,-497 -85.9,-498.1 -80.79,-503.21 -76.15,-503.21 -73.71,-500.78 -69.08,-500.78 -64.45,-505.41 -64.45,-510.04 -73.96,-519.55 -73.96,-524.18 -69.33,-528.81 -64.7,-528.81 -55.19,-519.3 -50.55,-519.3 -45.92,-523.94 -45.92,-528.57 -55.43,-538.08 -55.43,-542.71 -50.8,-547.34 -46.17,-547.34 -43.73,-544.9 -39.1,-544.9 -38,-546 v1(-31.55,-552.45)
  Inner4 w3.09: v1(-170.82,-43.56) -170.52,-43.86 -108.46,-43.86 v1(-108.16,-44.16)
DDR_D3: U1.105 U2.H3 | length 898.2
  Top w3.63: U2.H3@-43.31,-413.39 -43.1,-413.59 -43.1,-446.87 v1(-35.43,-454.54) ; U1.105@45.28,-149.6 45.28,-168 45.28,-184.69 41.87,-188.1 33.77,-188.1 30.36,-191.51 30.36,-198.33 33.77,-201.73 51.17,-201.73 54.58,-205.14 54.58,-211.96 51.17,-215.37 32.22,-215.37 28.81,-218.78 28.81,-225.6 32.22,-229 54.18,-229 56,-230.82 56,-232.77 61.31,-238.08 v1(61.86,-238.08)
  Inner3 w3.1: v1(61.86,-238.08) 62.37,-238.58 62.37,-246.37 64,-248 66,-250 66,-261.59 62.72,-264.87 51.21,-264.87 47.93,-268.14 47.93,-274.7 51.21,-277.97 63.36,-277.97 66.63,-281.25 66.63,-287.8 63.36,-291.07 53.33,-291.07 50.06,-294.35 50.06,-300.9 53.33,-304.17 62.72,-304.17 66,-307.45 66,-309 66,-387.12 73.73,-394.86 73.73,-414.71 63.44,-425 63.44,-472.68 v1(73.99,-483.23)
  Inner4 w3.09: v1(-35.43,-454.54) -35.43,-455.57 -31,-460 -28.1,-462.9 -28.1,-481.19 -24.83,-484.46 -18.29,-484.46 -15.01,-481.19 -15.01,-463.27 -11.74,-460 -5.2,-460 -1.93,-463.27 -1.93,-480.19 1.34,-483.46 7.89,-483.46 11.16,-480.19 11.16,-454.36 14.43,-451.09 20.97,-451.09 24.25,-454.36 24.25,-486.67 27.52,-489.95 34.06,-489.95 37.33,-486.67 37.33,-456.69 40.6,-453.42 47.15,-453.42 50.42,-456.69 50.42,-486.64 53.69,-489.91 60.23,-489.91 63,-487.15 63,-467 70,-460 81,-460 85,-464 85,-481 82,-484 75,-484 v1@74,-483 ; v1(73.99,-483.23) 75.31,-484.55 v1@77.55,-484.55
DDR_D4: U1.106 U2.H1 | length 909.5
  Top w3.63: v1(-138,-452) -124.96,-452 -121.94,-455.02 -112.97,-455.02 -109.95,-452 -65.44,-452 -57.13,-443.69 -57.13,-376.17 -43,-362.04 U2.H1@-43,-348 ; v1(30.68,-83.25) 30.72,-83.22 45.41,-83.22 53.17,-90.98 53.17,-113.01 U1.106@55.12,-114.96
  Inner3 w3.1: v1(-174.51,-59.13) -172.94,-59.13 -165.02,-67.04 -161.82,-67.04 -152.87,-75.99 -152.87,-92 -152.87,-117.59 -156.15,-120.87 -159.6,-120.87 -162.87,-124.14 -162.87,-130.7 -159.6,-133.97 -151.17,-133.97 -147.89,-137.25 -147.89,-143.8 -151.17,-147.07 -156.55,-147.07 -159.83,-150.35 -159.83,-156.9 -156.55,-160.17 -156.15,-160.17 -152.87,-163.45 -152.87,-165 -152.87,-167.13 -150.9,-169.1 -150.9,-261.73 -154.63,-265.46 -154.63,-429.37 -142.92,-441.08 -142.92,-445.21 -138,-450.13 v1(-138,-452)
  Inner4 w3.09: v1(-174.51,-59.13) -138.64,-59.13 -132.5,-53 -113.91,-53 -111.82,-55.09 -97.72,-55.09 -95.02,-57.79 -81.15,-57.79 -78.27,-54.91 -68.11,-54.91 -63.83,-50.63 -39.8,-50.63 -19.76,-70.66 -5.05,-70.66 9.96,-85.67 18.97,-85.67 21.05,-83.59 30.35,-83.59 v1(30.68,-83.25)
DDR_D5: U1.73 U2.H9 | length 912.3
  Top w3.63: U1.73@-225.2,-51.18 -224.55,-51.82 -202.11,-51.82 v1(-201.47,-52.47) ; v1(-57.03,-584.57) -55.78,-585.82 -55.78,-589.89 U2.H9@-43.31,-602.36
  Inner3 w3.1: v1(-265.66,-282.88) -265.66,-177.56 -253.14,-165.05 -253.14,-129.24 -240.04,-116.14 -240.04,-110.12 -221.86,-91.94 -221.86,-72.86 v1(-201.47,-52.47) ; v1(-81.08,-285.74) -79.68,-285.74 -67.45,-297.97 -67.45,-316.49 -72.45,-321.49 -72.45,-360.95 -84.93,-373.44 -84.93,-405.71 -70.55,-420.09 -70.55,-452.33 -56.72,-466.16 -56.72,-472.87 -21,-508.59 -21,-561 -44.57,-584.57 v1(-57.03,-584.57)
  Inner4 w3.09: v1(-265.66,-282.88) -219,-282.88 -217.46,-282.88 -214.18,-279.61 -214.18,-279.41 -210.91,-276.14 -204.37,-276.14 -201.1,-279.41 -201.1,-285.64 -197.83,-288.91 -191.28,-288.91 -188.01,-285.64 -188.01,-279.41 -184.74,-276.14 -178.2,-276.14 -174.93,-279.41 -174.93,-285.93 -171.65,-289.2 -165.11,-289.2 -161.84,-285.93 -161.84,-279.41 -158.57,-276.14 -152.02,-276.14 -148.75,-279.41 -148.75,-285.93 -145.48,-289.2 -138.94,-289.2 -135.67,-285.93 -135.67,-279.41 -132.39,-276.14 -125.85,-276.14 -122.58,-279.41 -122.58,-279.61 -119.31,-282.88 -97,-282.88 -86.25,-282.88 -86.03,-283.11 -85.58,-283.11 -82.95,-285.74 v1(-81.08,-285.74)
DDR_D6: U1.109 U2.F1 | length 915.6
  Top w3.63: v1(-203.08,-458) -202.51,-458 -177.52,-482.99 -77.94,-482.99 -74.09,-486.84 -29.84,-486.84 2.01,-454.99 2.01,-368.07 U2.F1@19.68,-350.39 ; v1(57.98,-186.98) 59.7,-186.98 64.86,-181.82 65.48,-181.82 74.14,-173.16 80.84,-173.16 84.65,-169.35 U1.109@84.65,-149.6
  Inner3 w3.1: v1(-203.08,-458) -203.08,-398.63 -206,-395.71 -206,-278.47 -178.29,-250.76 -178.29,-243.37 v1(-176.97,-242.05)
  Inner4 w3.09: v1(-176.97,-242.05) -175.65,-240.73 -170.13,-240.73 -167.95,-238.54 -152.68,-238.54 -136.51,-222.37 -80.73,-222.37 -70.64,-232.46 34.32,-232.46 42.31,-224.47 42.31,-214.12 54.08,-202.34 61.79,-202.34 66.18,-197.95 66.18,-194.58 58.58,-186.98 v1(57.98,-186.98)
DDR_D7: U1.70 U2.F9 | length 936.9
  Top w3.63: v1(-280.36,-20.85) -279.96,-21.25 -260.24,-21.25 U1.70@-259.84,-21.65 ; U2.F9@20,-600.72 20.3,-600.72 33,-588.02 v1(33,-587)
  Inner3 w3.1: v1(28.2,-67.16) 28.35,-67.16 33.86,-72.67 37.68,-72.67 41.23,-76.22 41.23,-90.41 45.86,-95.03 45.86,-240.82 40.74,-245.94 40.74,-277.55 42.96,-279.76 42.96,-324.11 41.45,-325.62 41.45,-369.96 52.3,-380.82 52.3,-411.39 56.34,-415.42 56.34,-439.62 56,-439.96 56,-564 v1(33,-587)
  Inner4 w3.09: v1(-280.36,-20.85) -279.21,-22 -194.75,-22 -177.04,-4.29 -176.48,-4.29 -173.46,-1.27 -82.25,-1.27 -54.86,-28.65 -31.71,-28.65 -11.19,-49.17 13.38,-49.17 19.58,-55.38 19.58,-60.26 26.48,-67.16 v1(28.2,-67.16)
DDR_D8: U1.66 U2.C8 | length 938.1
  Top w3.63: v1(-278.49,16.75) -278.01,17.23 -260.33,17.23 U1.66@-259.84,17.72 ; v1(100,-549) 101.22,-550.22 101.22,-557.91 U2.C8@114.17,-570.87
  Inner3 w3.1: v1(41.96,-41.05) 41.96,-42.79 57.17,-58.01 61.27,-58.01 82,-78.74 82,-142 95.04,-155.04 95.04,-375.99 102.14,-383.09 102.14,-412.68 105.84,-416.39 105.84,-525.3 100,-531.15 v1(100,-549)
  Inner4 w3.09: v1(-278.49,16.75) -277.9,17.35 -185.36,17.35 -182.71,19.99 -30.49,19.99 -3.66,-6.84 -3.66,-15.34 8,-27 27.91,-27 v1(41.96,-41.05)
DDR_D9: U1.112 U2.C2 | length 937.4
  Top w3.63: U2.C2@114.17,-381.89 115.67,-383.39 115.67,-395.34 131.85,-411.52 131.85,-419.11 147.74,-435 159.76,-435 v1(167.16,-427.6) ; U1.112@114.17,-114.96 114.17,-94.17 110,-90 106.18,-86.18 106.18,-74.55 109.59,-71.14 117.65,-71.14 121.06,-67.73 121.06,-60.91 117.65,-57.5 109.42,-57.5 106.01,-54.1 106.01,-47.28 109.42,-43.87 120.83,-43.87 124.23,-40.46 124.23,-33.64 120.83,-30.24 109.59,-30.24 106.18,-26.83 106.18,-20 106.18,-11.52 114.7,-3 124.28,-3 129.28,-8 v1(131,-8)
  Inner3 w3.1: v1(131,-8) 139,-16 139,-19 139,-20.55 142.28,-23.83 143.17,-23.83 146.45,-27.1 146.45,-33.65 143.17,-36.93 132.28,-36.93 129,-40.2 129,-46.75 132.28,-50.03 143.17,-50.03 146.45,-53.3 146.45,-59.86 143.17,-63.13 132.28,-63.13 129,-66.41 129,-72.96 132.28,-76.23 139.17,-76.23 142.45,-79.51 142.45,-86.06 139.17,-89.33 132.28,-89.33 129,-92.61 129,-99.16 132.28,-102.44 146.44,-102.44 148,-104 168.04,-124.04 168.04,-130 168.04,-144.65 164.76,-147.93 164.28,-147.93 161,-151.2 161,-157.75 164.28,-161.03 168.65,-161.03 171.92,-164.3 171.92,-170.86 168.65,-174.13 164.28,-174.13 161,-177.41 161,-183.96 164.28,-187.23 171.36,-187.23 174.63,-190.51 174.63,-197.06 171.36,-200.33 164.28,-200.33 161,-203.61 161,-210.16 164.28,-213.44 171.36,-213.44 174.63,-216.71 174.63,-223.26 171.36,-226.54 164.28,-226.54 161,-229.81 161,-236.36 164.28,-239.64 167.3,-239.64 170.58,-242.91 170.58,-249.46 167.3,-252.74 164.28,-252.74 161,-256.02 161,-262.57 164.28,-265.84 166.84,-265.84 170.11,-269.12 170.11,-275.67 166.84,-278.94 164.28,-278.94 161,-282.22 161,-288.77 164.28,-292.04 168.11,-292.04 171.38,-295.32 171.38,-301.87 168.11,-305.15 164.28,-305.15 161,-308.42 161,-314.97 164.28,-318.25 171.36,-318.25 174.63,-321.52 174.63,-328.07 171.36,-331.35 164.28,-331.35 161,-334.62 161,-341.18 164.28,-344.45 171.36,-344.45 174.63,-347.73 174.63,-354.28 171.36,-357.55 164.28,-357.55 161,-360.83 161,-367.38 164.28,-370.65 171.36,-370.65 174.63,-373.93 174.63,-380.48 171.36,-383.76 ; v1(167.16,-427.6) 175,-419.76 175,-398.45 168.43,-391.88 168.04,-391.49 168.04,-387.03 171.31,-383.76
DDR_D10: U1.68 U2.D7 | length 895.7
  Top w3.63: v1(-280,-2) -260.02,-1.98 U1.68@-259.52,-1.48 ; v1(71.35,-528.74) 71.7,-528.74 82.33,-539.37 U2.D7@82.68,-539.37
  Inner3 w3.1: v1(54.5,-76.92) 53.18,-78.24 53.18,-81.97 52.96,-82.19 52.96,-108.1 56.9,-112.04 56.9,-147.03 73.73,-163.86 73.73,-384.81 80.83,-391.91 80.83,-421.5 81.7,-422.37 84.54,-425.21 84.54,-450 84.54,-453.8 81.27,-457.07 77.82,-457.07 74.54,-460.35 74.54,-466.9 77.82,-470.17 81.27,-470.17 84.54,-473.45 84.54,-475 84.54,-487.6 71.35,-500.79 v1(71.35,-528.74)
  Inner4 w3.09: v1(-280,-2) -211.88,-2 -207.33,-6.54 -189.32,-6.54 -179.98,2.8 -179.87,2.8 -176.84,5.82 -56.16,5.82 -8.26,-42.09 18.04,-42.09 43.59,-67.65 45.45,-67.65 54.5,-76.7 v1(54.5,-76.92)
DDR_D11: U1.110 U2.D3 | length 931.1
  Top w3.63: U2.D3@83.29,-414 84.81,-415.52 84.81,-427.16 108.65,-451 110,-451 125.45,-451 128.86,-454.41 128.86,-457.59 132.27,-461 139.09,-461 142.5,-457.59 142.5,-452.39 145.9,-448.98 152.72,-448.98 156.13,-452.39 156.13,-457.59 159.54,-461 166.36,-461 169.76,-457.59 169.76,-454.41 173.17,-451 182.76,-451 194.47,-451 v1(201.74,-443.73) ; U1.110@94.49,-114.96 94.49,-90.47 98.38,-86.58 98.38,-44.12 98.55,-43.95 98.55,16.55 v1(115,33)
  Inner3 w3.1: v1(115,33) 106.45,24.45 106.45,-22.37 117,-32.92 117,-36 117,-43.67 113.72,-46.94 111.33,-46.94 108.05,-50.22 108.05,-56.77 111.33,-60.04 113.72,-60.04 117,-63.32 117,-105.51 125.49,-114 126.25,-114.75 127.34,-115.85 131.97,-115.85 134.41,-113.41 139.05,-113.41 143.68,-118.04 143.68,-122.68 141.24,-125.12 141.24,-129.75 141.65,-130.16 142.75,-131.25 153.9,-142.41 153.9,-273.47 150.77,-276.6 148.28,-279.08 148.28,-283.72 153.9,-289.34 153.9,-295.89 150.63,-299.16 145.96,-299.16 142.69,-302.44 142.69,-308.99 145.96,-312.26 150.63,-312.26 153.9,-315.54 153.9,-322.09 150.63,-325.36 145.96,-325.36 142.69,-328.64 142.69,-335.19 145.96,-338.47 150.63,-338.47 153.9,-341.74 153.9,-348.29 150.63,-351.57 150.21,-351.57 146.94,-354.84 146.94,-377 147.28,-377.34 147.28,-399.28 153.9,-405.9 153.9,-430.9 166.73,-443.73 v1(201.74,-443.73)
DDR_D12: U1.111 U2.D1 | length 864.9
  Top w3.63: v1(-231.92,-318.72) -231.6,-318.41 -231.6,-258.64 v1(-231.28,-258.32) ; v1(55.45,-314.72) 72.11,-331.39 72.11,-339.83 78.64,-346.36 U2.D1@80.37,-346.36 ; U1.111@104.33,-149.6 104.99,-150.26 104.99,-183.35 v1(105.64,-184)
  Inner4 w3.09: v1(-231.92,-318.72) -209.19,-296 -192,-296 ; v1(-231.28,-258.32) -201,-258.32 -186.37,-258.32 -183.1,-261.59 -183.1,-262.99 -179.83,-266.26 -173.28,-266.26 -170.01,-262.99 -170.01,-260.65 -166.74,-257.38 -160.2,-257.38 -156.93,-260.65 -156.93,-262.99 -153.65,-266.26 -147.11,-266.26 -143.84,-262.99 -143.84,-260.65 -140.57,-257.38 -134.02,-257.38 -130.75,-260.65 -130.75,-262.99 -127.48,-266.26 -120.94,-266.26 -117.67,-262.99 -117.67,-261.59 -114.39,-258.32 -99,-258.32 -22.94,-258.32 -20.41,-260.85 55.66,-260.85 103.8,-212.7 103.8,-189.27 104.32,-188.75 104.32,-185.33 v1(105.64,-184) ; -192,-296.28 -75.53,-296.28 -62,-309.81 -52.53,-309.81 -42.92,-300.2 38.92,-300.2 51.72,-313 51.85,-313 53.58,-314.72 v1(55.45,-314.72)
DDR_D13: U1.67 U2.D9 | length 897.8
  Top w3.63: U1.67@-225.2,7.88 v1@-204.88,7.88 ; v1(69,-589) 69.31,-589 U2.D9@82.68,-602.36
  Inner3 w3.1: v1(63.99,-89.81) 64.83,-90.65 64.83,-97.53 67.51,-100.2 67.51,-147.59 80.83,-160.92 80.83,-381.87 87.93,-388.97 87.93,-418.56 88.8,-419.42 91.64,-422.27 91.64,-490.54 81.9,-500.28 81.9,-532.61 87.48,-538.19 87.48,-570.52 v1(69,-589)
  Inner4 w3.09: v1(-202,4) -200.15,4 -194.26,9.88 -182.8,9.88 -179.78,12.91 -33.43,12.91 -13.08,-7.44 -13.08,-18.92 3,-35 20.97,-35 45.03,-59.06 56.38,-59.06 65.31,-67.98 65.31,-88.49 v1(63.99,-89.81)
DDR_D14: U1.114 U2.B1 | length 922.7
  Top w3.63: v1(117,-16) 118.72,-16 125.08,-22.36 130.06,-22.36 133.86,-26.16 133.86,-33 133.86,-34.82 137.27,-38.23 140.45,-38.23 143.86,-41.64 143.86,-48.45 140.45,-51.86 132.1,-51.86 128.69,-55.27 128.69,-62.09 132.1,-65.5 140.45,-65.5 143.86,-68.9 143.86,-75.72 140.45,-79.13 137.27,-79.13 133.86,-82.54 133.86,-99 U1.114@133.86,-114.96 ; U2.B1@145.67,-350.39 162.27,-367 v1(196,-367)
  Inner3 w3.1: v1(117,-16) 117.73,-15.27 117.73,-6.35 127.25,3.18 142.9,3.18 148.63,-2.55 169.55,-2.55 181,-14 181,-18 181,-19.55 184.28,-22.83 187.72,-22.83 191,-26.1 191,-32.65 187.72,-35.93 174.28,-35.93 171,-39.2 171,-45.75 174.28,-49.03 187.72,-49.03 191,-52.3 191,-58.86 187.72,-62.13 174.28,-62.13 171,-65.41 171,-71.96 174.28,-75.23 187.72,-75.23 191,-78.51 191,-85.06 187.72,-88.33 174.28,-88.33 171,-91.61 171,-98.16 174.28,-101.44 187.72,-101.44 191,-104.71 191,-111.26 187.72,-114.54 181.83,-114.54 178.55,-117.81 178.55,-124.36 181.83,-127.64 187.72,-127.64 191,-130.91 191,-137.46 187.72,-140.74 184.28,-140.74 181,-144.02 181,-149 181,-151 196,-166 196,-173 196,-182.58 192.72,-185.85 190.27,-185.85 187,-189.13 187,-195.68 190.27,-198.96 199.17,-198.96 202.45,-202.23 202.45,-208.78 199.17,-212.06 190.27,-212.06 187,-215.33 187,-221.88 190.27,-225.16 199.75,-225.16 203.02,-228.43 203.02,-234.98 199.75,-238.26 190.27,-238.26 187,-241.54 187,-248.09 190.27,-251.36 200.05,-251.36 203.33,-254.64 203.33,-261.19 200.05,-264.46 190.27,-264.46 187,-267.74 187,-274.29 190.27,-277.56 200.05,-277.56 203.33,-280.84 203.33,-287.39 200.05,-290.67 190.27,-290.67 187,-293.94 187,-300.49 190.27,-303.77 200.05,-303.77 203.33,-307.04 203.33,-313.59 200.05,-316.87 190.27,-316.87 187,-320.14 187,-326.7 190.27,-329.97 196.73,-329.97 200.01,-333.25 200.01,-339.8 196.73,-343.07 190.27,-343.07 187,-346.35 187,-352.9 190.27,-356.17 192.72,-356.17 196,-359.45 196,-361 v1(196,-367)
DDR_D15: U1.65 U2.B9 | length 947.2
  Top w3.63: U1.65@-225.2,27.56 -225.03,27.72 -202.28,27.72 v1@-202,28 ; v1(132,-590) 132.65,-590 145.01,-602.36 U2.B9@145.67,-602.36
  Inner3 w3.1: v1(57.88,-42.6) 57.88,-43.84 89.1,-75.06 89.1,-112.06 107.8,-130.75 107.8,-170.22 116.2,-178.63 116.2,-190.94 102.14,-205 102.14,-373.05 111.78,-382.69 111.78,-412.28 118.11,-418.61 118.11,-435.59 132.6,-450.08 132.6,-459.6 137.94,-464.94 137.94,-476.12 141,-479.19 141,-581 v1(132,-590)
  Inner4 w3.09: v1@-202,28 -201.46,28.54 -137.81,28.54 -135.01,31.35 -2.32,31.35 32.76,-3.74 32.76,-16.18 38.94,-22.35 52.35,-22.35 57.88,-27.88 v1(57.88,-42.6)
  other v1: -202,27.89
DDR_LDM: U1.108 U2.F3 | length 927.1
  Top w3.63: U2.F3@19.68,-413.39 33.54,-427.25 38.02,-427.25 55.64,-444.87 55.64,-452.93 75.11,-472.41 171.99,-472.41 180.4,-464 v1(206,-464) ; U1.108@74.8,-114.96 74.8,-62.2 87.56,-49.44 v1(87.56,-48.56)
  Inner3 w3.1: v1(87.56,-48.56) 87.56,-49.6 109.9,-71.93 109.9,-108.45 120.1,-118.65 126.05,-124.6 132,-130.55 132,-135 132,-136.55 135.28,-139.83 138,-139.83 141.27,-143.1 141.27,-149.65 138,-152.93 125.28,-152.93 122,-156.2 122,-162.75 125.28,-166.03 128.72,-166.03 132,-169.3 132,-178 132,-179 132,-206.75 135.28,-210.03 143.53,-210.03 146.8,-213.3 146.8,-219.86 143.53,-223.13 126.72,-223.13 123.44,-226.41 123.44,-232.96 126.72,-236.23 143.53,-236.23 146.8,-239.51 146.8,-246.06 143.53,-249.33 126.72,-249.33 123.44,-252.61 123.44,-259.16 126.72,-262.44 138.86,-262.44 142.13,-265.71 142.13,-272.26 138.86,-275.54 126.72,-275.54 123.44,-278.81 123.44,-285.36 126.72,-288.64 132.35,-288.64 135.62,-291.91 135.62,-298.46 132.35,-301.74 126.72,-301.74 123.44,-305.02 123.44,-311.57 126.72,-314.84 128.72,-314.84 132,-318.12 132,-332.55 132.42,-332.97 132.42,-334.96 139.84,-342.38 139.84,-364 139.84,-388.96 140.17,-389.3 140.17,-402.22 146.8,-408.84 146.8,-446.13 164.67,-464 v1(206,-464)
DDR_LDQS: U1.113 U2.F7 | length 894.6
  Top w3.63: v1(8,-524) 8,-525.72 20,-537.72 U2.F7@20,-538 ; v1(114.35,-207.71) 114.35,-206.92 124.02,-197.25 U1.113@124.02,-149.6
  Inner3 w3.1: v1(114.35,-207.71) 113.03,-209.03 113.03,-216.74 109.24,-220.52 109.24,-317.45 111.19,-319.4 111.19,-372.06 118.88,-379.75 118.88,-402.35 139.7,-423.16 139.7,-453.7 143,-457 144.1,-458.1 147.48,-461.48 147.48,-466.11 147.36,-466.23 147.36,-470.87 151.99,-475.5 156.62,-475.5 159.36,-472.76 163.99,-472.76 168.63,-477.39 168.63,-482.02 156.11,-494.54 156.11,-499.17 160.74,-503.8 165.37,-503.8 175.27,-493.9 179.9,-493.9 181,-495 188,-502 196.13,-502 201.13,-497 v1(203,-497)
  Inner4 w3.09: v1(8,-524) 8.24,-523.76 8.24,-516.79 18.66,-506.37 28,-497.03 37,-497.03 ; 37.03,-497 42.63,-497 45.9,-500.27 45.9,-512.25 49.17,-515.52 55.72,-515.52 58.99,-512.25 58.99,-500.27 62.26,-497 68.8,-497 72.07,-500.27 72.07,-512.25 75.35,-515.52 81.89,-515.52 85.16,-512.25 85.16,-495.69 88.43,-492.42 94.98,-492.42 98.25,-495.69 98.25,-511.39 101.52,-514.67 108.06,-514.67 111.33,-511.39 111.33,-490.27 114.61,-487 121.15,-487 124.42,-490.27 124.42,-512.25 127.69,-515.52 134.23,-515.52 137.51,-512.25 137.51,-490.27 140.78,-487 147.32,-487 150.59,-490.27 150.59,-512.25 153.86,-515.52 160.41,-515.52 163.68,-512.25 163.68,-490.27 166.95,-487 173.49,-487 176.77,-490.27 176.77,-493.73 180.04,-497 193,-497 v1(203,-497)
DDR_ODT: U1.74 U2.K9 | length 911
  Top w3.63: v1(-284,-76) -284,-66 -279.02,-61.02 U1.74@-259.84,-61.02 ; v1(-106,-621) -106.15,-620.85 -106.15,-601.15 U2.K9@-106,-601
  Inner3 w3.1: v1(-334.79,-570) -334.79,-556.49 -334.79,-554.94 -338.06,-551.66 -341.51,-551.66 -344.79,-548.39 -344.79,-541.84 -341.51,-538.56 -336.36,-538.56 -333.09,-535.29 -333.09,-528.74 -336.36,-525.46 -341.51,-525.46 -344.79,-522.18 -344.79,-515.63 -341.51,-512.36 -338.06,-512.36 -334.79,-509.08 -334.79,-490.14 -334.79,-483.75 -315.3,-464.27 -315.3,-340.3 -293.46,-318.46 -293.46,-252.14 -289,-247.68 -289,-170.05 -281.77,-162.81 -281.77,-160.81 -280.22,-159.26 -280.22,-154.63 -283.49,-151.35 -285.73,-151.35 -289,-148.08 -289,-141.52 -285.73,-138.25 -277.72,-138.25 -274.45,-134.97 -274.45,-128.42 -277.72,-125.15 -286.03,-125.15 -289.31,-121.87 -289.31,-115.32 -286.03,-112.05 -277.72,-112.05 -274.45,-108.77 -274.45,-89.87 -274.45,-85.55 -278.49,-81.51 v1(-284,-76)
  Inner4 w3.09: v1(-334.79,-570) -304.24,-600.54 -259.12,-600.54 -250.4,-591.82 -205.27,-591.82 -173.09,-624 -144.58,-624 -131.04,-610.46 -116.54,-610.46 v1(-106,-621)